# EAGLE board home HVAC (EAGLE 7.6.0)

Size 73.58 x 63.39 mm. Coordinates in mm from the lower left corner, seen from the top.
Outline: 0,0 56.82,0 56.82,53.33 0,53.33 0,0
Copper layers (1*16): Top 0.035mm / dielectric 1.5mm / Bottom 0.035mm
Design rules "default": minimum track width 10mil, minimum drill 24mil, track to track 8mil, track to pad 8mil, pad to pad 8mil, via to via 8mil, smd to smd 8mil, copper to edge 40mil, drill to drill 8mil, minimum pad ring 10mil, minimum via ring 8mil, stop-mask expansion 4mil, vias tented up to drill 0mil, thermal gap 10mil

## Footprints (pad centres in the part's own frame; a part is rotated, then mirrored left to right if it is on the bottom)
LED5MM = drill 0.813 octagon: A -1.27,0; K 1.27,0
SNR6-D19.0MM = drill 1.3 pad 2: 1 -3.355,3.355; 2 -3.355,-3.355; 3 3.355,3.355; 4 3.355,-3.355; 5 0,4.75; 6 0,-4.75
0207/10 = drill 0.813 octagon: 1 -5.08,0; 2 5.08,0
B25V = drill 0.813 long: A 2.54,0.635; E -2.54,0.635; S 0,0.635
TL1105 = drill 1 pad 1.676: 1 -2.25,3.25; 2 2.25,3.25; 3 -2.25,-3.25; 4 2.25,-3.25
ARDUINO_UNO = drill 1.016 pad 1.88: 0 63.5,50.8; 1 60.96,50.8; 2 58.42,50.8; 3 55.88,50.8; 3.3V 35.56,2.54; 4 53.34,50.8; 5 50.8,50.8; 5V 38.1,2.54; 6 48.26,50.8; 7 45.72,50.8; 8 41.656,50.8; 9 39.116,50.8; 10 36.576,50.8; 11 34.036,50.8; 12 31.496,50.8; 13 28.956,50.8; A0 50.8,2.54; A1 53.34,2.54; A2 55.88,2.54; A3 58.42,2.54; A4 60.96,2.54; A5 63.5,2.54; AREF 23.876,50.8; GND 26.416,50.8; GND. 43.18,2.54; GND.. 40.64,2.54; I/OREF 30.48,2.54; N/C 27.94,2.54; RESET 33.02,2.54; SCL 18.796,50.8; SDA 21.336,50.8; VIN 45.72,2.54 | hole 3.2: 66.04,7.62; 66.04,35.56; 15.24,50.8; 13.97,2.54
1X16P-2.54-2.54-11.6-3.0-BLACK-MALE = drill 0.889 pad 1.651 square: 1 0,19.05 | drill 0.889 pad 1.651: 2 0,16.51; 3 0,13.97; 4 0,11.43; 5 0,8.89; 6 0,6.35; 7 0,3.81; 8 0,1.27; 9 0,-1.27; 10 0,-3.81; 11 0,-6.35; 12 0,-8.89; 13 0,-11.43; 14 0,-13.97; 15 0,-16.51; 16 0,-19.05
TO92 = drill 0.813 octagon: 1 1.27,0; 2 0,1.905; 3 -1.27,0

## Placement (x,y rotation side)
Drelay1  [LED5MM]  5,22.78 0 top
Drelay2  [LED5MM]  5,35.48 0 top
GASCH4  [SNR6-D19.0MM]  5,60.88 0 top
GASCO2  [SNR6-D19.0MM]  5,73.58 0 top  (outside the outline)
R1  100‎Ω  [0207/10]  5,111.68 0 top  (outside the outline)
R2  100‎Ω  [0207/10]  5,124.38 0 top  (outside the outline)
R5  220‎Ω  [0207/10]  5,149.78 0 top  (outside the outline)
Rbut1  5k‎Ω  [0207/10]  5,200.58 0 top  (outside the outline)
Rbut2  5k‎Ω  [0207/10]  5,213.28 0 top  (outside the outline)
Rch4rez  47k‎Ω  [0207/10]  5,86.28 0 top  (outside the outline)
Rco2rez  47k‎Ω  [0207/10]  5,98.98 0 top  (outside the outline)
Rpot1  250k‎Ω  [B25V]  5,162.48 0 top  (outside the outline)
S2  [TL1105]  5,175.18 0 top  (outside the outline)
S3  [TL1105]  5,187.88 0 top  (outside the outline)
U1  [ARDUINO_UNO]  5,10.08 0 top
U7  [1X16P-2.54-2.54-11.6-3.0-BLACK-MALE]  5,137.08 0 top  (outside the outline)
Utemp  [TO92]  5,48.18 0 top

## Library data of the parts
Drelay1 Drelay2 GASCH4 GASCO2 R1 R2 R5 Rbut1 Rbut2 Rch4rez Rco2rez Rpot1 S2 S3 U1 U7 Utemp = AUTODESK_CIRCUITS_BREADBOARD

## Nets
N$1: GASCO2.2 U1.0
N$2: GASCH4.2 U1.1
N$3: GASCO2.4 Rco2rez.2
N$4: GASCH4.4 Rch4rez.1
N$5: GASCH4.1 GASCH4.3 GASCH4.5 GASCO2.1 GASCO2.3 GASCO2.5 R5.1 Rpot1.A S2.1 S3.1 U1.5V U7.2 Utemp.3
N$6: Drelay1.A R2.2
N$7: Drelay2.A R1.2
N$8: U1.12 U7.4
N$9: U1.11 U7.6
N$10: U1.5 U7.11
N$11: U1.4 U7.12
N$12: R5.2 U7.15
N$13: R1.1 U1.8
N$14: R2.1 U1.7
N$15: U1.6 Utemp.2
N$16: Drelay1.K Drelay2.K GASCH4.6 GASCO2.6 Rbut1.2 Rbut2.2 Rch4rez.2 Rco2rez.1 Rpot1.E U1.GND.. U7.1 U7.5 U7.16 Utemp.1
N$17: Rpot1.S U7.3
N$18: Rbut2.1 S2.2 U1.2
N$19: Rbut1.1 S3.2 U1.3
N$20: U1.10 U7.13
N$21: U1.9 U7.14

## Tracks (layer width: path | path; a pad name or v marks a point on that pad's centre or on a via)
N$1  (1 unrouted)
N$2  (1 unrouted)
N$3  (1 unrouted)
N$4  (1 unrouted)
N$5  (12 unrouted)
N$6  (1 unrouted)
N$7  (1 unrouted)
N$8  (1 unrouted)
N$9  (1 unrouted)
N$10  (1 unrouted)
N$11  (1 unrouted)
N$12  (1 unrouted)
N$13  (1 unrouted)
N$14  (1 unrouted)
N$15  (1 unrouted)
N$16  (13 unrouted)
N$17  (1 unrouted)
N$18  (2 unrouted)
N$19  (2 unrouted)
N$20  (1 unrouted)
N$21  (1 unrouted)